# EAGLE board megacommand_1_0_2a12 (EAGLE 7.3.0), part 1 of 2
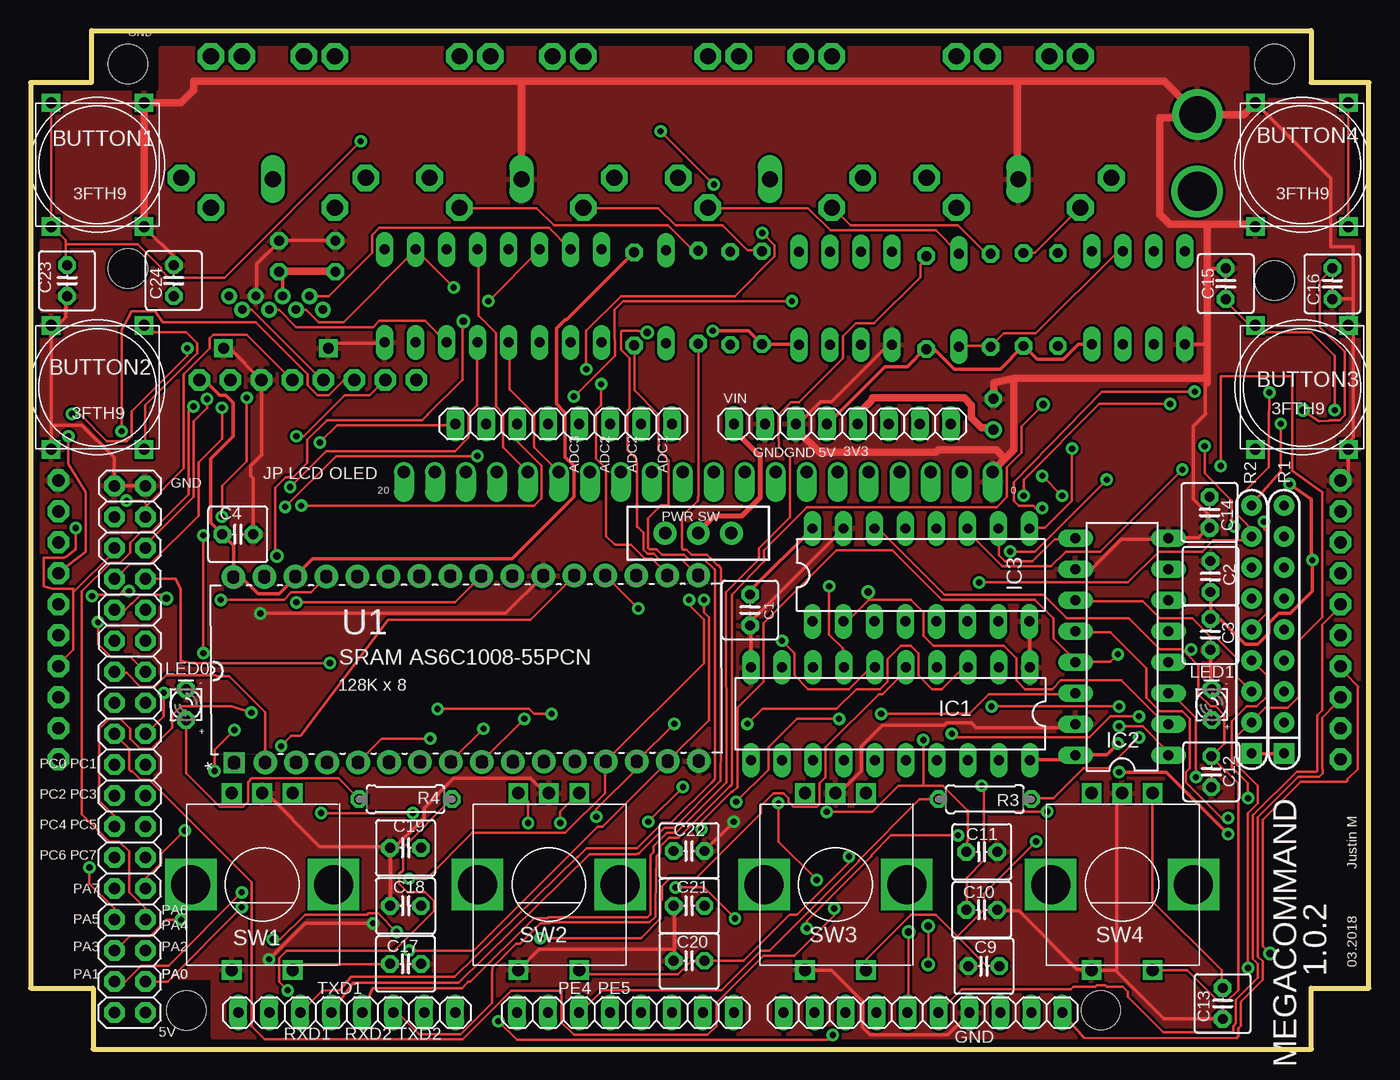
[diagram p0: board, top side]
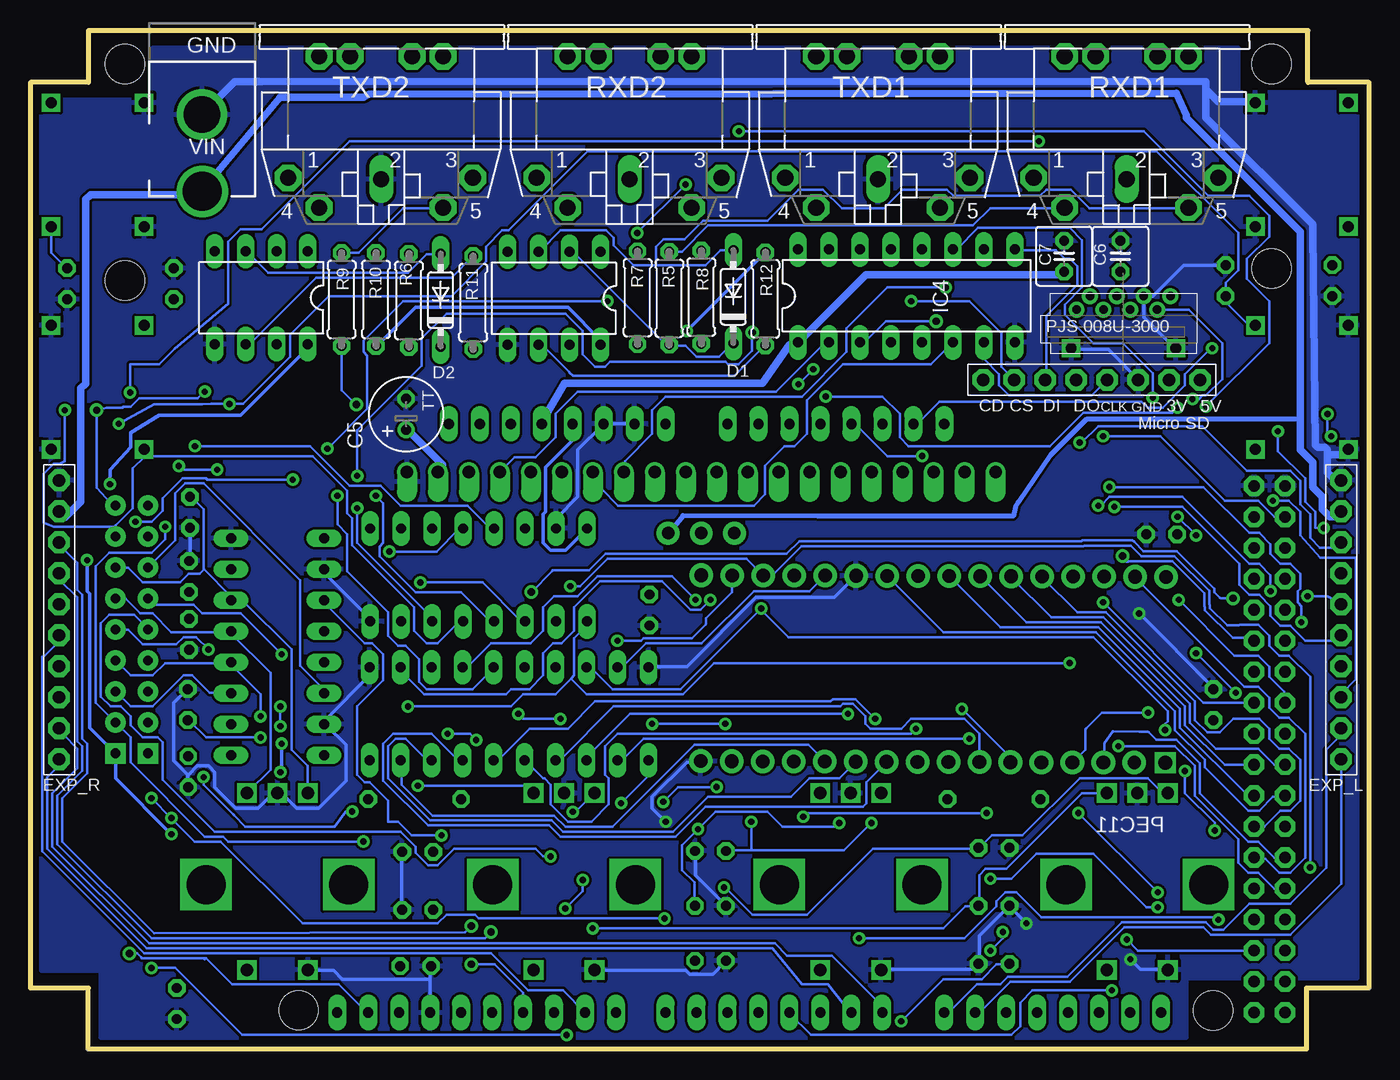
[diagram p1: board, bottom side, seen from below]

Size 109.75 x 83.5 mm. Coordinates in mm from the lower left corner, seen from the top.
Outline: 0,79.25 0,5 5.13,5 5.13,0 105.03,0 105,5 109.75,5 109.75,79.25 105,79.25 105,83.5 5,83.5 5,79.25 0,79.25
Copper layers (1*16): Top 0.035mm / dielectric 1.5mm / Bottom 0.035mm
Design rules "SparkFun": minimum track width 8mil, minimum drill 20mil, track to track 8mil, track to pad 8mil, pad to pad 8mil, via to via 8mil, smd to smd 8mil, copper to edge 10mil, drill to drill 8mil, minimum pad ring 12mil, minimum via ring 10mil, stop-mask expansion 4mil, vias tented up to drill 25mil, thermal gap 10mil
Net classes: 0 default: width 0.203 mm, drill 0.406 mm, clearance 0.203 mm; 1 power: width 0.305 mm, drill 0.406 mm, clearance 0.203 mm; 2 gnd: width 0.305 mm, drill 0.406 mm, clearance 0.203 mm; 3 vss: width 0.508 mm, drill 0.406 mm, clearance 0.203 mm
Holes 3.2 mm at 87.77,3.2 12.79,3.17 8,64 102,63 8,80.75 102,80.75
tKeepout: area 99.8,9.8 to 109.8,19.8; area 99.8,19.8 to 109.8,20.8; area 99.8,20.8 to 109.8,21.8
tRestrict: area 5.4,0.2 to 5.8,5.6; area 0.2,5.2 to 5.4,5.6; area 0.2,5.6 to 0.6,53.5; area 0.2,53.5 to 0.6,79; area 0.6,78.6 to 5.6,79; area 5.2,79 to 5.6,83.2; area 5.6,82.5 to 104.8,83.2; area 104.1,78.4 to 104.8,82.5; area 104.8,78.5 to 109.5,79; area 109.1,5.2 to 109.5,78.5; area 104.2,5.2 to 109.1,5.8; area 104.2,0.1 to 104.8,5.6; 5 more areas
bRestrict: area 5.4,0.2 to 5.8,5.6; area 0.2,5.2 to 5.4,5.6; area 0.2,5.6 to 0.6,53.5; area 0.2,53.5 to 0.6,79; area 0.6,78.6 to 5.6,79; area 5.2,79 to 5.6,83.2; area 5.6,82.5 to 104.8,83.2; area 104.1,78.4 to 104.8,82.5; area 104.8,78.5 to 109.5,79; area 109.1,5.2 to 109.5,78.5; area 104.2,5.2 to 109.1,5.8; area 104.2,0.1 to 104.8,5.6; 5 more areas

## Footprints (pad centres in the part's own frame; a part is rotated, then mirrored left to right if it is on the bottom)
1X08 = drill 0.85 pad 1.422 long: 1 -8.89,0; 2 -6.35,0; 3 -3.81,0; 4 -1.27,0; 5 1.27,0; 6 3.81,0; 7 6.35,0; 8 8.89,0
3FT = drill 0.9 square: P$1 5.08,3.81; P$2 -5.08,3.81; P$3 5.08,-3.81; P$4 -5.08,-3.81
C025-050X050 = drill 0.813 octagon: 1 -1.27,0; 2 1.27,0
TT2D6 = drill 0.813: + -1.27,0 | drill 0.813 octagon: - 1.27,0
DO35-7 = drill 0.813 long: A 3.81,0; C -3.81,0
1X10-BIG = drill 1.016 pad 1.778 octagon: 1 -11.43,0; 2 -8.89,0; 3 -6.35,0; 4 -3.81,0; 5 -1.27,0; 6 1.27,0; 7 3.81,0; 8 6.35,0; 9 8.89,0; 10 11.43,0
DIL20 = drill 0.813 long: 1 -11.43,-3.81; 2 -8.89,-3.81; 3 -6.35,-3.81; 4 -3.81,-3.81; 5 -1.27,-3.81; 6 1.27,-3.81; 7 3.81,-3.81; 8 6.35,-3.81; 9 8.89,-3.81; 10 11.43,-3.81; 11 11.43,3.81; 12 8.89,3.81; 13 6.35,3.81; 14 3.81,3.81; 15 1.27,3.81; 16 -1.27,3.81; 17 -3.81,3.81; 18 -6.35,3.81; 19 -8.89,3.81; 20 -11.43,3.81
DIL16 = drill 0.813 long: 1 -8.89,-3.81; 2 -6.35,-3.81; 3 -3.81,-3.81; 4 -1.27,-3.81; 5 1.27,-3.81; 6 3.81,-3.81; 7 6.35,-3.81; 8 8.89,-3.81; 9 8.89,3.81; 10 6.35,3.81; 11 3.81,3.81; 12 1.27,3.81; 13 -1.27,3.81; 14 -3.81,3.81; 15 -6.35,3.81; 16 -8.89,3.81
POWER_JACK_PTH_LOCK = drill 2.997 pad 4.115: GND 0.025,7.573 | drill 3.2 pad 4.115: PWR 0,13.878
1X08-BIG = drill 1.016 pad 1.778 octagon: 1 -8.89,0; 2 -6.35,0; 3 -3.81,0; 4 -1.27,0; 5 1.27,0; 6 3.81,0; 7 6.35,0; 8 8.89,0
1X10 = drill 0.85 pad 1.422 long: 1 -11.43,0; 2 -8.89,0; 3 -6.35,0; 4 -3.81,0; 5 -1.27,0; 6 1.27,0; 7 3.81,0; 8 6.35,0; 9 8.89,0; 10 11.43,0
LED_LD260 = drill 0.813 octagon: A -1.27,0; K 1.27,0
DIL08 = drill 0.813 long: 1 -3.81,-3.81; 2 -1.27,-3.81; 3 1.27,-3.81; 4 3.81,-3.81; 5 3.81,3.81; 6 1.27,3.81; 7 -1.27,3.81; 8 -3.81,3.81
YAMAICHI_MICROSD_VERTICAL = drill 0.9 square: GND1 -4.3,-3.17; GND2 4.3,-3.17 | drill 0.7: P$1 -3.85,0; P$2 -2.75,1.1; P$3 -1.65,0; P$4 -0.55,1.1; P$5 0.55,0; P$6 1.65,1.1; P$7 2.75,0; P$8 3.85,1.1
RPACK-SIP-PTH-8 = drill 0.8 pad 1.676 square: P$1 0,0 | drill 0.8 pad 1.676: P$2 0,-2.54; P$3 0,-5.08; P$4 0,-7.62; P$5 0,-10.16; P$6 0,-12.7; P$7 0,-15.24; P$8 0,-17.78; P$9 0,-20.32
0207/7 = drill 0.813 octagon: 1 -3.81,0; 2 3.81,0
SWITCH-SPDT_KIT = drill 1.016 pad 1.88: 1 0,2.718; 2 0,0; 3 0,-2.718
ALPS_EC12E_SW = drill 1 square: A -2.5,-7.5; B 2.5,-7.5; C 0,-7.5; D -2.5,7; E 2.5,7 | drill 3.2 square: GND1 -5.85,0; GND2 5.85,0
DIP254P1524X393-32 = drill 1.118 square: 1 -15.24,38.1 | drill 1.1 pad 1.93: 2 -15.24,35.56 | drill 1.118 pad 1.93: 3 -15.24,33.02; 4 -15.24,30.48; 5 -15.24,27.94; 6 -15.24,25.4; 7 -15.24,22.86; 8 -15.24,20.32; 9 -15.24,17.78; 10 -15.24,15.24; 11 -15.24,12.7; 12 -15.24,10.16; 13 -15.24,7.62; 14 -15.24,5.08; 15 -15.24,2.54; 16 -15.24,0; 17 0,0; 18 0,2.54; 19 0,5.08; 20 0,7.62; 21 0,10.16; 22 0,12.7; 23 0,15.24; 24 0,17.78; 25 0,20.32; 26 0,22.86; 27 0,25.4; 28 0,27.94; 29 0,30.48; 30 0,33.02; 31 0,35.56; 32 0,38.1
20PIN = drill 1.016 offset: P$1 -24.13,0; P$2 -21.59,0; P$3 -19.05,0; P$4 -16.51,0; P$5 -13.97,0; P$6 -11.43,0; P$7 -8.89,0; P$8 -6.35,0; P$9 -3.81,0; P$10 -1.27,0; P$11 1.27,0; P$12 3.81,0; P$13 6.35,0; P$14 8.89,0; P$15 11.43,0; P$16 13.97,0; P$17 16.51,0; P$18 19.05,0; P$19 21.59,0; P$20 24.13,0
CP-2350 = drill 1.321 pad 2.184 octagon: 1 7.62,12.58; 3 -7.52,12.58; 4 5.08,15.02; 5 -5.08,15.02; PE -2.54,2.62; PE1 -5.08,2.62; PE2 5.08,2.62; PE@ 2.54,2.62 | drill 1.321 long: 2 0,12.68
2X18 = drill 0.95 pad 1.676 octagon: 1 -21.59,-1.27; 2 -21.59,1.27; 3 -19.05,-1.27; 4 -19.05,1.27; 5 -16.51,-1.27; 6 -16.51,1.27; 7 -13.97,-1.27; 8 -13.97,1.27; 9 -11.43,-1.27; 10 -11.43,1.27; 11 -8.89,-1.27; 12 -8.89,1.27; 13 -6.35,-1.27; 14 -6.35,1.27; 15 -3.81,-1.27; 16 -3.81,1.27; 17 -1.27,-1.27; 18 -1.27,1.27; 19 1.27,-1.27; 20 1.27,1.27; 21 3.81,-1.27; 22 3.81,1.27; 23 6.35,-1.27; 24 6.35,1.27; 25 8.89,-1.27; 26 8.89,1.27; 27 11.43,-1.27; 28 11.43,1.27; 29 13.97,-1.27; 30 13.97,1.27; 31 16.51,-1.27; 32 16.51,1.27; 33 19.05,-1.27; 34 19.05,1.27; 35 21.59,-1.27; 36 21.59,1.27

## Placement (x,y rotation side)
ADCL  8x1F-H8.5  [1X08]  43.71,51.26 180 top
BUTTON1  3FT1D  [3FT]  5.5,72.5 270 top
BUTTON2  3FT1D  [3FT]  5.5,54.25 90 top
BUTTON3  3FT1D  [3FT]  104.25,54.25 90 top
BUTTON4  3FT1D  [3FT]  104.25,72.5 90 top
C1  0.1uF  [C025-050X050]  59,36 90 top
C2  0.1uF  [C025-050X050]  96.75,38.75 270 top
C3  0.1uF  [C025-050X050]  96.75,34 90 top
C4  0.1uF  [C025-050X050]  17,42.2 180 top
C5  220uF  [TT2D6]  78.95,52.05 90 bottom
C6  0.1uF  [C025-050X050]  20.38,65 90 bottom
C7  10uF  [C025-050X050]  25,65 90 bottom
C9  0.1uF  [C025-050X050]  78.17,6.82 0 top
C10  0.1uF  [C025-050X050]  78,11.43 180 top
C11  0.1uF  [C025-050X050]  78,16.18 180 top
C12  0.1uF  [C025-050X050]  96.83,22.75 90 top
C13  0.1uF  [C025-050X050]  97.75,3.75 90 top
C14  0.1uF  [C025-050X050]  96.67,44 90 top
C15  0.1uF  [C025-050X050]  98,62.75 270 top
C16  0.1uF  [C025-050X050]  106.75,62.75 90 top
C17  0.1uF  [C025-050X050]  30.75,7 180 top
C18  0.1uF  [C025-050X050]  30.75,11.75 0 top
C19  0.1uF  [C025-050X050]  30.75,16.5 0 top
C20  0.1uF  [C025-050X050]  54,7.25 0 top
C21  0.1uF  [C025-050X050]  54,11.75 0 top
C22  0.1uF  [C025-050X050]  54,16.25 180 top
C23  0.1uF  [C025-050X050]  3,63 90 top
C24  0.1uF  [C025-050X050]  11.75,63 270 top
COMMUNICATION  8x1F-H8.5  [1X08]  25.93,3 0 top
D1  1N4148  [DO35-7]  52.12,61.68 90 bottom
D2  1N4148  [DO35-7]  76.12,61.41 90 bottom
EXP_L  PINHD-1X10  [1X10-BIG]  2.29,35.2 90 bottom
EXP_R  PINHD-1X10  [1X10-BIG]  107.41,35.2 90 bottom
IC1  74HC573N  [DIL20]  70.5,27.5 180 top
IC2  74LS165N  [DIL16]  89.5,33 90 top
IC3  74LS165N  [DIL16]  73,38.88 0 top
IC4  HC4050  [DIL16]  37.92,61.75 0 bottom
J1  POWER_JACKPTH_LOCK  [POWER_JACK_PTH_LOCK]  95.66,84.18 180 bottom
JP1  [1X08-BIG]  22.74,54.86 180 bottom
JP6  10x1F-H8.5  [1X10]  73.17,3 180 top
LED0  5mm LED  [LED_LD260]  12.75,28.25 90 top
LED1  5mm LED  [LED_LD260]  96.85,28.25 90 top
OK1  6N137  [DIL08]  66.83,61.55 180 bottom
OK2  6N137  [DIL08]  90.83,61.6 180 bottom
PJS008U  YAMAICHI_SD_CARD  [YAMAICHI_MICROSD_VERTICAL]  20.12,60.62 0 bottom
POWER  8x1F-H8.5  [1X08]  66.57,51.26 180 top
PWML  8x1F-H8.5  [1X08]  48.79,3 0 top
R1  4609X-AP1-103LF  [RPACK-SIP-PTH-8]  102.78,24.25 180 top
R2  10K 4609X-AP1-103LF  [RPACK-SIP-PTH-8]  100.12,24.25 180 top
R3  220  [0207/7]  78.25,20.5 0 top
R4  220  [0207/7]  30.75,20.5 180 top
R5  220  [0207/7]  57.38,61.55 270 bottom
R6  220  [0207/7]  78.72,61.38 270 bottom
R7  220  [0207/7]  59.98,61.6 270 bottom
R8  220  [0207/7]  54.75,61.65 270 bottom
R9  220  [0207/7]  84.24,61.45 270 bottom
R10  220  [0207/7]  81.43,61.45 270 bottom
R11  1k  [0207/7]  73.45,61.2 270 bottom
R12  1k  [0207/7]  49.5,61.5 90 bottom
S1  EG1218  [SWITCH-SPDT_KIT]  54.75,42.3 90 top
SW1  PEC11  [ALPS_EC12E_SW]  19,13.5 180 top
SW2  PEC11  [ALPS_EC12E_SW]  42.5,13.5 180 top
SW3  PEC11  [ALPS_EC12E_SW]  66,13.5 180 top
SW4  PEC11  [ALPS_EC12E_SW]  89.5,13.5 180 top
U1  AS6C1008-55PCN  [DIP254P1524X393-32]  54.75,38.85 90.2 top
U$2  20PIN  [20PIN]  54.75,47.31 180 top
U$7  MIDIJACK  [CP-2350]  81,84 180 bottom
U$8  MIDIJACK  [CP-2350]  60.62,84 180 bottom
U$9  MIDIJACK  [CP-2350]  40.25,84 180 bottom
U$10  MIDIJACK  [CP-2350]  19.88,84 180 bottom
XIO  18x2F-H8.5  [2X18]  8.15,24.59 90 top

## Library data of the parts
ADCL COMMUNICATION JP6 POWER PWML XIO = SmartPrj
BUTTON1-BUTTON4 = mec switches
C1-C4 C6 C7 C9-C24 = rcl
C5 R3-R12 = resistor
D1 D2 = diode
EXP_L EXP_R JP1 U$7-U$10 = adafruit
IC1-IC3 = 74xx-us
IC4 = 45xx
J1 = SparkFun-Connectors; PROD_ID: CONN-08197; SF_ID: PRT-00119
LED0 LED1 = eagle-ltspice; SPICEMODEL: NONE; SPICEPREFIX: D; SPICETYPE: diode
OK1 OK2 = optocoupler2; MPN: 6N137; OC_FARNELL: 1328376; OC_NEWARK: 52M1895
PJS008U = MusicThingModular
R1 R2 = SparkFun-Resistors
S1 = SparkFun-Electromechanical; PROD_ID: SWCH-08261
SW1-SW4 = pec11-n; MPN: EC12E2424407; OC_FARNELL: 1520813; OC_NEWARK: 74M1068
U1 = sram; OC_FARNELL: 1562896; OC_NEWARK: 94M6214; PACKAGE: DIP-32; SUPPLIER: ALLIANCE MEMORY
U$2 = OLED2

## Nets
+3V3 [power]: C5.+ C6.1 C7.1 IC4.1 PJS008U.P$4 POWER.4 U$2.P$2
+5V [power]: C1.2 C2.2 C3.2 C4.2 IC1.20 IC2.16 IC3.16 JP1.1 OK1.8 OK2.8 POWER.5 R1.P$1 R2.P$1 R7.2 R10.2 R11.2 R12.2 U1.30 U1.32
ADC0: ADCL.1
ADC1: ADCL.2
ADC2: ADCL.3
ADC3: ADCL.4
ADC4: ADCL.5 EXP_L.5
ADC5: ADCL.6 EXP_L.6
ADC6: ADCL.7 EXP_L.7
ADC7: ADCL.8 EXP_L.8
AREF: JP6.3
CD: JP1.8
GND [power]: BUTTON1.P$1 BUTTON1.P$2 BUTTON2.P$1 BUTTON2.P$2 BUTTON3.P$3 BUTTON3.P$4 BUTTON4.P$1 BUTTON4.P$2 C1.1 C2.1 C3.1 C4.1 C5.- C6.2 C7.2 C9.1 C10.1 C11.1 C12.1 C13.1 C14.1 C15.1 C16.1 C17.1 C18.1 C19.1 C20.1 C21.1 C22.1 C23.1 C24.1 EXP_L.10 EXP_R.10 IC1.1 IC1.10 IC2.8 IC2.10 IC2.15 IC3.8 IC3.15 IC4.8 J1.GND JP1.3 JP6.4 LED0.K LED1.K OK1.5 OK2.5 PJS008U.GND1 PJS008U.GND2 PJS008U.P$6 POWER.6 POWER.7 SW1.C SW1.E SW2.C SW2.E SW3.C SW3.E SW4.C SW4.E U1.16 U1.22 U$2.P$1 U$7.2 U$9.2 XIO.35 XIO.36
INS0: C18.2 IC2.11 R2.P$3 SW1.A
INS1: C19.2 IC2.12 R2.P$4 SW1.B
INS2: C21.2 IC2.13 R2.P$6 SW2.A
INS3: C22.2 IC2.14 R2.P$7 SW2.B
INS4: C10.2 IC2.3 R1.P$3 SW3.A
INS5: C11.2 IC2.4 R1.P$4 SW3.B
INS6: C13.2 IC2.5 R1.P$6 SW4.A
INS7: C14.2 IC2.6 R1.P$7 SW4.B
INS8: C17.2 IC3.11 R2.P$2 SW1.D
INS9: C20.2 IC3.12 R2.P$5 SW2.D
INS10: C9.2 IC3.13 R1.P$2 SW3.D
INS11: C12.2 IC3.14 R1.P$5 SW4.D
INS12: BUTTON1.P$3 BUTTON1.P$4 C23.2 IC3.3 R2.P$8
INS13: BUTTON2.P$3 BUTTON2.P$4 C24.2 IC3.4 R2.P$9
INS14: BUTTON3.P$1 BUTTON3.P$2 C15.2 IC3.5 R1.P$8
INS15: BUTTON4.P$3 BUTTON4.P$4 C16.2 IC3.6 R1.P$9
N$1: R8.1 U$9.5
N$2: IC4.15 PJS008U.P$2
N$3: LED0.A R4.2
N$4: IC1.13 U1.6
N$5: IC1.19 U1.12
N$6: IC1.18 U1.11
N$7: IC1.17 U1.10
N$8: IC1.16 U1.9
N$9: IC1.15 U1.8
N$10: IC1.14 U1.7
N$11: IC1.12 U1.5
N$12: IC2.9 IC3.10
N$13: LED1.A R3.2
N$14: D1.A OK1.3 U$10.5
N$15: R5.1 U$10.4
N$16: R7.1 U$9.4
N$17: R10.1 U$7.4
N$18: D2.C OK2.2 R6.2
N$19: D2.A OK2.3 U$8.5
N$21: R6.1 U$8.4
N$22: R9.1 U$7.5
N$25: IC4.2 U$2.P$4
N$26: D1.C OK1.2 R5.2
N$28: IC4.6 PJS008U.P$5 U$2.P$7
N$29: IC4.10 PJS008U.P$3 U$2.P$8
N$30: IC4.4 U$2.P$15
N$31: IC4.12 U$2.P$16
PA0: IC1.2 U1.13 XIO.3
PA1: IC1.3 U1.14 XIO.4
PA2: IC1.4 U1.15 XIO.5
PA3: IC1.5 U1.17 XIO.6
PA4: IC1.6 U1.18 XIO.7
PA5: IC1.7 U1.19 XIO.8
PA6: IC1.8 U1.20 XIO.9
PA7: IC1.9 U1.21 XIO.10
PB0: IC4.14 JP1.7 XIO.34
PB1: EXP_L.3 IC4.7 JP1.4 XIO.33
PB2: EXP_L.4 IC4.9 JP1.6 XIO.32
PB3: JP1.5 PJS008U.P$7 XIO.31
PB4: JP6.8
PB5: EXP_R.8 JP6.7
PB6: EXP_R.7 JP6.6
PB7: EXP_R.6 JP6.5
PC0: U1.27 XIO.18
PC1: U1.26 XIO.17
PC2: U1.23 XIO.16
PC3: U1.25 XIO.15
PC4: U1.4 XIO.14
PC5: U1.28 XIO.13
PC6: U1.3 XIO.12
PC7: U1.31 XIO.11
PD0: COMMUNICATION.1
PD1: COMMUNICATION.2
PD7: IC4.11 XIO.19
PE0: EXP_R.2 PWML.1
PE1: EXP_R.1 PWML.2
PE3: PWML.6
PE4: PWML.3 R3.1
PE5: PWML.4 R4.1
PG0: U1.29 XIO.22
PG1: U1.24 XIO.21
PG2: IC1.11 XIO.20
PG5: PWML.5
PH3: PWML.7
PH4: PWML.8
PH5: JP6.10
PH6: EXP_R.5 JP6.9
PL0: IC3.9 XIO.30
PL1: IC2.1 IC3.1 XIO.29
PL2: IC2.2 IC3.2 XIO.28
PL3: XIO.27
PL4: XIO.26
PL5: IC4.3 XIO.25
PL6: U1.2 XIO.24
PL7: IC4.5 XIO.23
RESET: POWER.3
RXD1: COMMUNICATION.3 OK1.6 R12.1
RXD2: COMMUNICATION.5 OK2.6 R11.1
RXD3: COMMUNICATION.7 EXP_L.1
SCL: EXP_R.3 JP6.1
SDA: EXP_R.4 JP6.2
TXD1: COMMUNICATION.4 R8.2
TXD2: COMMUNICATION.6 R9.2
TXD3: COMMUNICATION.8 EXP_L.2
VDD: IC4.16
VIN [power]: POWER.8 S1.2
VSS [power]: EXP_L.9 EXP_R.9 J1.PWR S1.3